# EAGLE board untitled (EAGLE 9.6.2)
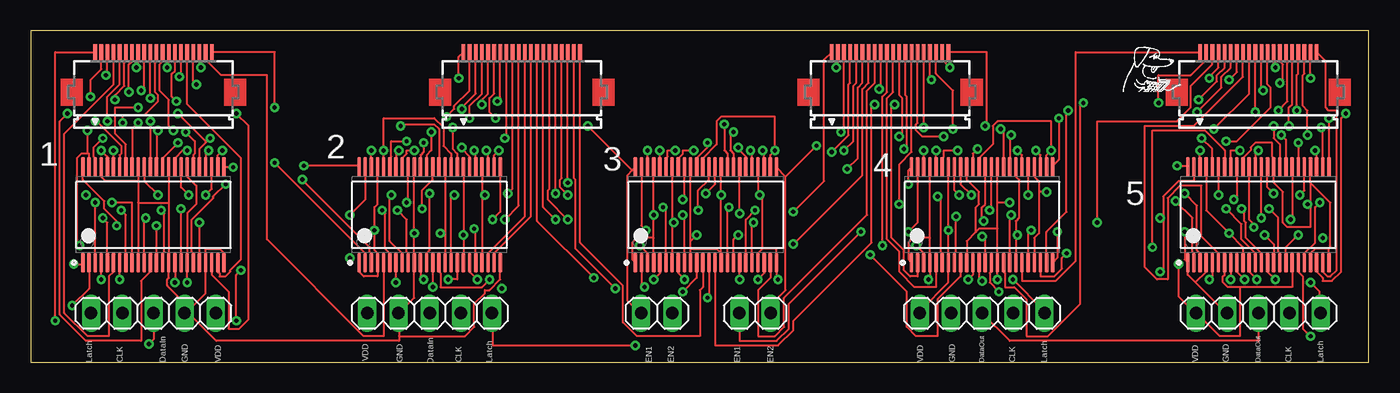
[diagram p0: board, top side]
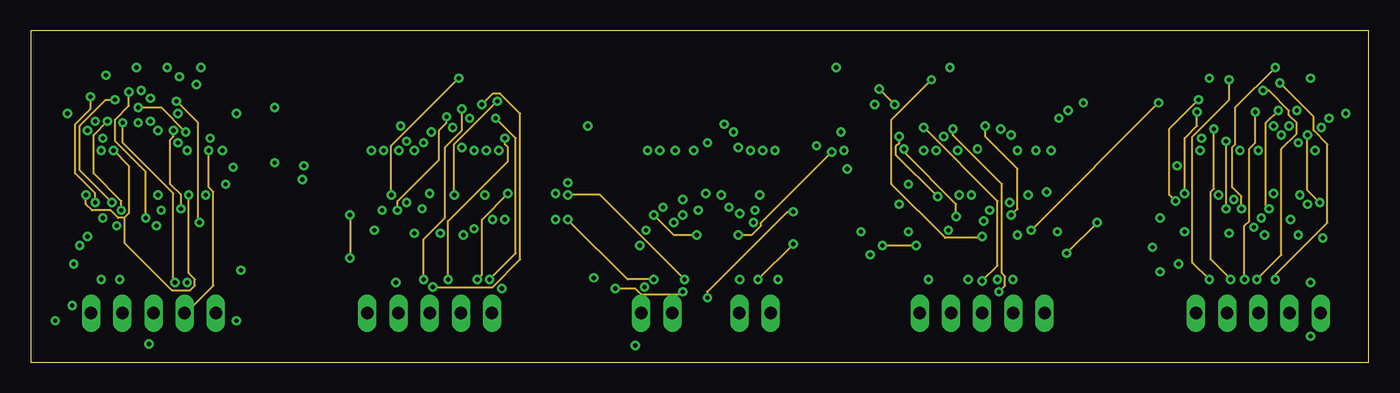
[diagram p1: board, inner layer Route2]
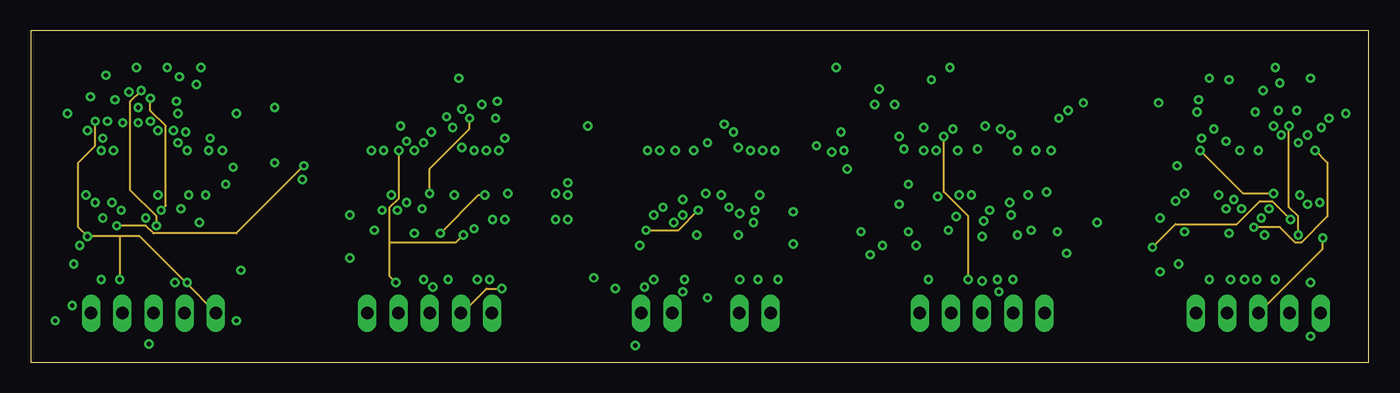
[diagram p2: board, inner layer Route15]
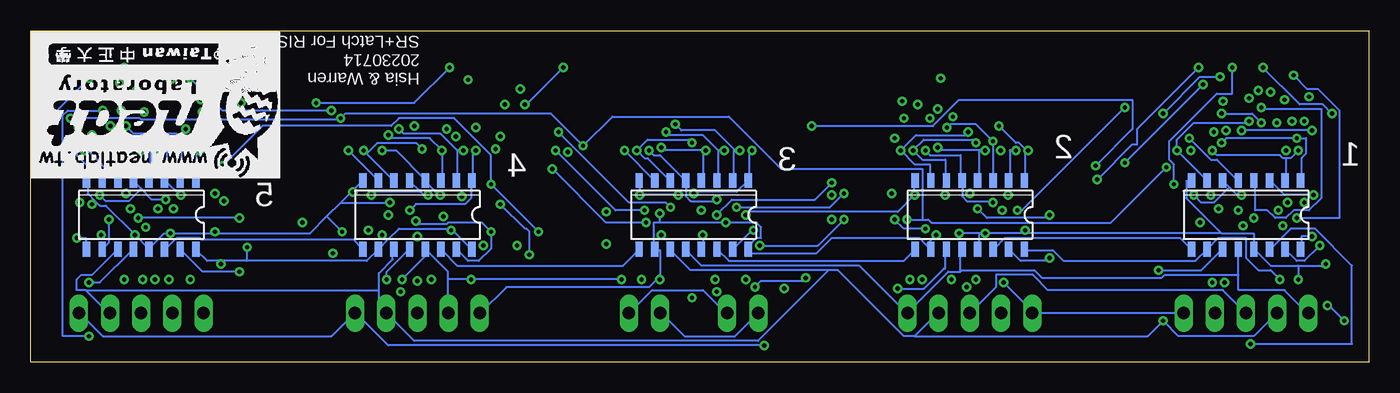
[diagram p3: board, bottom side, seen from below]

Size 109 x 27 mm. Coordinates in mm from the lower left corner, seen from the top.
Outline: 0,0 109,0 109,27 0,27 0,0
Copper layers (1*16): Top 0.035mm / dielectric 1.5mm / Bottom 0.035mm
Design rules "default": minimum track width 6mil, minimum drill 0.35mm, track to track 6mil, track to pad 6mil, pad to pad 6mil, via to via 6mil, smd to smd 6mil, copper to edge 40mil, drill to drill 6mil, minimum pad ring 10mil, minimum via ring 8mil, stop-mask expansion 4mil, vias tented up to drill 0mil, thermal gap 10mil

## Footprints (pad centres in the part's own frame; a part is rotated, then mirrored left to right if it is on the bottom)
1X05 = drill 1.016 long: 1 -5.08,0; 2 -2.54,0; 3 0,0; 4 2.54,0; 5 5.08,0
1X02 = drill 1.016 long: 1 -1.27,0; 2 1.27,0
SO16 = smd 0.6 x 1.2: 1 -4.445,-2.8; 2 -3.175,-2.8; 3 -1.905,-2.8; 4 -0.635,-2.8; 5 0.635,-2.8; 6 1.905,-2.8; 7 3.175,-2.8; 8 4.445,-2.8; 9 4.445,2.8; 10 3.175,2.8; 11 1.905,2.8; 12 0.635,2.8; 13 -0.635,2.8; 14 -1.905,2.8; 15 -3.175,2.8; 16 -4.445,2.8
TEXAS_INSTRUMENTS_SN74LVC16373A_2 = smd 1.6 x 0.3: 1 -3.9,5.75; 2 -3.9,5.25; 3 -3.9,4.75; 4 -3.9,4.25; 5 -3.9,3.75; 6 -3.9,3.25; 7 -3.9,2.75; 8 -3.9,2.25; 9 -3.9,1.75; 10 -3.9,1.25; 11 -3.9,0.75; 12 -3.9,0.25; 13 -3.9,-0.25; 14 -3.9,-0.75; 15 -3.9,-1.25; 16 -3.9,-1.75; 17 -3.9,-2.25; 18 -3.9,-2.75; 19 -3.9,-3.25; 20 -3.9,-3.75; 21 -3.9,-4.25; 22 -3.9,-4.75; 23 -3.9,-5.25; 24 -3.9,-5.75; 25 3.9,-5.75; 26 3.9,-5.25; 27 3.9,-4.75; 28 3.9,-4.25; 29 3.9,-3.75; 30 3.9,-3.25; 31 3.9,-2.75; 32 3.9,-2.25; 33 3.9,-1.75; 34 3.9,-1.25; 35 3.9,-0.75; 36 3.9,-0.25; 37 3.9,0.25; 38 3.9,0.75; 39 3.9,1.25; 40 3.9,1.75; 41 3.9,2.25; 42 3.9,2.75; 43 3.9,3.25; 44 3.9,3.75; 45 3.9,4.25; 46 3.9,4.75; 47 3.9,5.25; 48 3.9,5.75
FH12-20S-0.5SH = smd 0.3 x 1.3: 1 -4.75,3.25; 2 -4.25,3.25; 3 -3.75,3.25; 4 -3.25,3.25; 5 -2.75,3.25; 6 -2.25,3.25; 7 -1.75,3.25; 8 -1.25,3.25; 9 -0.75,3.25; 10 -0.25,3.25; 11 0.25,3.25; 12 0.75,3.25; 13 1.25,3.25; 14 1.75,3.25; 15 2.25,3.25; 16 2.75,3.25; 17 3.25,3.25; 18 3.75,3.25; 19 4.25,3.25; 20 4.75,3.25

## Placement (x,y rotation side)
JP1  [1X05]  10,4 180 top
JP2  [1X05]  32.5,4 0 top
JP3  [1X05]  77.5,4 0 top
JP4  [1X05]  100,4 0 top
JP5  [1X02]  59,4 0 top
JP6  [1X02]  51,4 0 top
SR1  74HC595  [SO16]  10,12 180 bottom
SR2  74HC595  [SO16]  32.5,12 180 bottom
SR3  74HC595  [SO16]  55,12 180 bottom
SR4  74HC595  [SO16]  77.5,12 180 bottom
SR5  74HC595  [SO16]  100,12 180 bottom
U1  TEXAS_INSTRUMENTS_SN74LVC16373ATEXAS_INSTRUMENTS_SN74LVC16373A_0_2  [TEXAS_INSTRUMENTS_SN74LVC16373A_2]  10,12 90 top
U2  TEXAS_INSTRUMENTS_SN74LVC16373ATEXAS_INSTRUMENTS_SN74LVC16373A_0_2  [TEXAS_INSTRUMENTS_SN74LVC16373A_2]  32.5,12 90 top
U3  TEXAS_INSTRUMENTS_SN74LVC16373ATEXAS_INSTRUMENTS_SN74LVC16373A_0_2  [TEXAS_INSTRUMENTS_SN74LVC16373A_2]  55,12 90 top
U4  TEXAS_INSTRUMENTS_SN74LVC16373ATEXAS_INSTRUMENTS_SN74LVC16373A_0_2  [TEXAS_INSTRUMENTS_SN74LVC16373A_2]  77.5,12 90 top
U5  TEXAS_INSTRUMENTS_SN74LVC16373ATEXAS_INSTRUMENTS_SN74LVC16373A_0_2  [TEXAS_INSTRUMENTS_SN74LVC16373A_2]  100,12 90 top
U$1  [LOGO_SCALE_2.0]  88.7,26.9 180 bottom
X1  FH12-20S-0.5SH  [FH12-20S-0.5SH]  10,22 0 top
X2  FH12-20S-0.5SH  [FH12-20S-0.5SH]  40,22 0 top
X3  FH12-20S-0.5SH  [FH12-20S-0.5SH]  70,22 0 top
X4  FH12-20S-0.5SH  [FH12-20S-0.5SH]  100,22 0 top

## Library data of the parts
JP1-JP6 = pinhead
SR1-SR5 = 74HC595; AVAILABILITY: In Stock; DESCRIPTION: Shift Register Single 8-Bit Serial to Serial/Parallel 16-Pin SSOP T/R; MF: Nexperia; MP: 74HC595; PACKAGE: None; PRICE: None
U1-U5 = SN74LVC16373A(NEW_16BIT_LATCH); 3_STATE_OUTPUT: Yes; BITS: 16; CIIVA_IDS: 19307467; CODE__JEDEC: MO-153; DATASHEET_VERSION: SCAS755B; FOOTPRINT_VARIANT_NAME_0: Level C; FOOTPRINT_VARIANT_NAME_1: Level B; FOOTPRINT_VARIANT_NAME_2: Level A; F__NOM_VOLTAGEMAXMHZ: 100; ICC__NOM_VOLTAGEMAXMA: 0.02; IMPORTED: yes; IMPORTED_FROM: vault; IMPORT_TS: 1521844253; INPUT_TYPE: CMOS,TTL; LOGIC: true; MF: Texas Instruments; MPN: SN74LVC16373A; OPERATING_TEMPERATURE_RANGEC: -40 to 125,-40 to 85; OUTPUT_DRIVE_IOLIOHMAXMA: 24/-24; OUTPUT_LOGIC: Non-inverted; OUTPUT_TYPE: CMOS; PACKAGE: DGG0048A; PREFIX: U; RATING: Catalog; RELEASE_DATE: 1459328133; SCHMITT_TRIGGER: No; STATIC_CURRENT: 0.02; TECHNOLOGY_FAMILY: LVC; TPD__NOM_VOLTAGEMAXNS: 6.4,4.2,4.9; VAULT_GUID: 00FB3570-8383-4C82-A038-A58A20934C8C; VAULT_REVISION: B0EE8CD6-9ACA-4FFF-ACFC-C0240CF4C59E; VCC_MAX_V: 3.6; VCC_MIN_V: 1.65; VOLTAGE_NOM_V: 1.8,2.5,2.7,3.3
U$1 = all_in_one
X1-X4 = con-hirose; MPN: FH12-20S-0.5SH(55); OC_FARNELL: 1324549; OC_NEWARK: 34M6166

## Nets
CLK: JP1.4 JP2.4 JP3.4 JP4.4 SR1.11 SR2.11 SR3.11 SR4.11 SR5.11
DATA_IN: JP1.3 JP2.3 SR1.14
DATA_OUT: JP3.3 JP4.3 SR5.9
EN1: JP5.1 JP6.1 U1.48 U2.48 U3.48 U4.48 U5.48
EN2: JP5.2 JP6.2 U1.25 U2.25 U3.25 U4.25 U5.25
GND: JP1.2 JP2.2 JP3.2 JP4.2 SR1.8 SR1.13 SR2.8 SR2.13 SR3.8 SR3.13 SR4.8 SR4.13 SR5.8 SR5.13 U1.1 U1.4 U1.10 U1.15 U1.21 U1.24 U1.28 U1.34 U1.39 U1.45 U2.1 U2.4 U2.10 U2.15 U2.21 U2.24 U2.28 U2.34 U2.39 U2.45 U3.1 U3.4 U3.10 U3.15 U3.21 U3.24 U3.28 U3.34 U3.39 U3.45 U4.1 U4.4 U4.10 U4.15 U4.21 U4.24 U4.28 U4.34 U4.39 U4.45 U5.1 U5.4 U5.10 U5.15 U5.21 U5.24 U5.28 U5.34 U5.39 U5.45
LATCH_CLK: JP1.5 JP2.5 JP3.5 JP4.5 SR1.12 SR2.12 SR3.12 SR4.12 SR5.12
LED1_1: U1.2 X1.1
LED1_2: U1.3 X1.2
LED1_3: U1.5 X1.3
LED1_4: U1.6 X1.4
LED1_5: U1.8 X1.5
LED1_6: U1.9 X1.6
LED1_7: U1.11 X1.7
LED1_8: U1.12 X1.8
LED1_9: U1.13 X1.9
LED1_10: U1.14 X1.10
LED1_11: U1.16 X1.11
LED1_12: U1.17 X1.12
LED1_13: U1.19 X1.13
LED1_14: U1.20 X1.14
LED1_15: U1.22 X1.15
LED1_16: U1.23 X1.16
LED1_17: U2.2 X1.17
LED1_18: U2.3 X1.18
LED1_19: U2.5 X1.19
LED1_20: U2.6 X1.20
LED1_21: U2.8 X2.1
LED1_22: U2.9 X2.2
LED1_23: U2.11 X2.3
LED1_24: U2.12 X2.4
LED1_25: U2.13 X2.5
LED1_26: U2.14 X2.6
LED1_27: U2.16 X2.7
LED1_28: U2.17 X2.8
LED1_29: U2.19 X2.9
LED1_30: U2.20 X2.10
LED1_31: U2.22 X2.11
LED1_32: U2.23 X2.12
LED1_33: U3.2 X2.13
LED1_34: U3.3 X2.14
LED1_35: U3.5 X2.15
LED1_36: U3.6 X2.16
LED1_37: U3.8 X2.17
LED1_38: U3.9 X2.18
LED1_39: U3.11 X2.19
LED1_40: U3.12 X2.20
LED2_1: U3.13 X3.1
LED2_2: U3.14 X3.2
LED2_3: U3.16 X3.3
LED2_4: U3.17 X3.4
LED2_5: U3.19 X3.5
LED2_6: U3.20 X3.6
LED2_7: U3.22 X3.7
LED2_8: U3.23 X3.8
LED2_9: U4.2 X3.9
LED2_10: U4.3 X3.10
LED2_11: U4.5 X3.11
LED2_12: U4.6 X3.12
LED2_13: U4.8 X3.13
LED2_14: U4.9 X3.14
LED2_15: U4.11 X3.15
LED2_16: U4.12 X3.16
LED2_17: U4.13 X3.17
LED2_18: U4.14 X3.18
LED2_19: U4.16 X3.19
LED2_20: U4.17 X3.20
LED2_21: U4.19 X4.1
LED2_22: U4.20 X4.2
LED2_23: U4.22 X4.3
LED2_24: U4.23 X4.4
LED2_25: U5.2 X4.5
LED2_26: U5.3 X4.6
LED2_27: U5.5 X4.7
LED2_28: U5.6 X4.8
LED2_29: U5.8 X4.9
LED2_30: U5.9 X4.10
LED2_31: U5.11 X4.11
LED2_32: U5.12 X4.12
LED2_33: U5.13 X4.13
LED2_34: U5.14 X4.14
LED2_35: U5.16 X4.15
LED2_36: U5.17 X4.16
LED2_37: U5.19 X4.17
LED2_38: U5.20 X4.18
LED2_39: U5.22 X4.19
LED2_40: U5.23 X4.20
N$1: SR1.9 SR2.14
N$2: SR4.9 SR5.14
N$4: SR3.9 SR4.14
N$8: SR2.9 SR3.14
SR_OUT1_1: SR1.15 U1.36 U1.47
SR_OUT1_2: SR1.1 U1.35 U1.46
SR_OUT1_3: SR1.2 U1.33 U1.44
SR_OUT1_4: SR1.3 U1.32 U1.43
SR_OUT1_5: SR1.4 U1.30 U1.41
SR_OUT1_6: SR1.5 U1.29 U1.40
SR_OUT1_7: SR1.6 U1.27 U1.38
SR_OUT1_8: SR1.7 U1.26 U1.37
SR_OUT2_1: SR2.15 U2.36 U2.47
SR_OUT2_2: SR2.1 U2.35 U2.46
SR_OUT2_3: SR2.2 U2.33 U2.44
SR_OUT2_4: SR2.3 U2.32 U2.43
SR_OUT2_5: SR2.4 U2.30 U2.41
SR_OUT2_6: SR2.5 U2.29 U2.40
SR_OUT2_7: SR2.6 U2.27 U2.38
SR_OUT2_8: SR2.7 U2.26 U2.37
SR_OUT3_1: SR3.15 U3.36 U3.47
SR_OUT3_2: SR3.1 U3.35 U3.46
SR_OUT3_3: SR3.2 U3.33 U3.44
SR_OUT3_4: SR3.3 U3.32 U3.43
SR_OUT3_5: SR3.4 U3.30 U3.41
SR_OUT3_6: SR3.5 U3.29 U3.40
SR_OUT3_7: SR3.6 U3.27 U3.38
SR_OUT3_8: SR3.7 U3.26 U3.37
SR_OUT4_1: SR4.15 U4.36 U4.47
SR_OUT4_2: SR4.1 U4.35 U4.46
SR_OUT4_3: SR4.2 U4.33 U4.44
SR_OUT4_4: SR4.3 U4.32 U4.43
SR_OUT4_5: SR4.4 U4.30 U4.41
SR_OUT4_6: SR4.5 U4.29 U4.40
SR_OUT4_7: SR4.6 U4.27 U4.38
SR_OUT4_8: SR4.7 U4.26 U4.37
SR_OUT5_1: SR5.15 U5.36 U5.47
SR_OUT5_2: SR5.1 U5.35 U5.46
SR_OUT5_3: SR5.2 U5.33 U5.44
SR_OUT5_4: SR5.3 U5.32 U5.43
SR_OUT5_5: SR5.4 U5.30 U5.41
SR_OUT5_6: SR5.5 U5.29 U5.40
SR_OUT5_7: SR5.6 U5.27 U5.38
SR_OUT5_8: SR5.7 U5.26 U5.37
VCC: JP1.1 JP2.1 JP3.1 JP4.1 SR1.10 SR1.16 SR2.10 SR2.16 SR3.10 SR3.16 SR4.10 SR4.16 SR5.10 SR5.16 U1.7 U1.18 U1.31 U1.42 U2.7 U2.18 U2.31 U2.42 U3.7 U3.18 U3.31 U3.42 U4.7 U4.18 U4.31 U4.42 U5.7 U5.18 U5.31 U5.42

## Tracks (layer width: path | path; a pad name or v marks a point on that pad's centre or on a via)
CLK  (via drill 0.35)
  Top 0.152: v17.12,7.5 16.75,7.12 v16.75,3.38
  Route15 0.152: v38.38,6 37.12,6 35.12,4 JP2.4
  Bottom 0.152: 80.62,5.88 80.62,4 JP3.4 80,4 77.75,1.75 49.75,1.75 44,7.5 | 80.62,5.88 80.62,7.25 79.5,8.38 79.5,9.12 SR4.11 | 104.5,5.88 105.25,5.88 105.25,6.75 104.88,7.12 104,7.12 102,9.12 SR5.11 | 104.5,5.88 102.62,4 JP4.4 | 104.5,5.88 80.62,5.88 | v17.12,7.5 13.62,7.5 12,9.12 SR1.11 | JP1.4 7.5,4 9.38,2.12 15.5,2.12 v16.75,3.38 18,2.12 37,2.12 | v38.38,6 36.25,6 34.62,7.62 34.5,7.62 34.5,9.12 SR2.11 | 44,7.5 43.25,7.5 37.88,2.12 37,2.12 | 44,7.5 55.25,7.5 56.88,9.12 SR3.11 | 37,2.12 35.12,4 JP2.4
DATA_IN  (via drill 0.35)
  Top 0.152: v9.62,1.5 10,1.88 JP1.3
  Bottom 0.152: v9.62,1.5 1.38,1.5 1.38,7.88 4.38,10.88 6.38,10.88 8,9.25 SR1.14 | JP2.3 30.38,6.12 30.38,7.12 27.38,7.12 26.12,5.88 11.88,5.88 JP1.3
DATA_OUT  (via drill 0.35)
  Top 0.152: JP3.3 79.75,1.75 100,1.75 JP4.3
  Route15 0.152: v105.25,10.12 105.25,9.25 JP4.3
  Bottom 0.152: v105.25,10.12 104.5,10.12 104.5,9.25 SR5.9
EN1  (via drill 0.35)
  Top 0.152: U1.48 4.25,14.88 6,13.12 6,12.5 7,11.5 v7,11.12 | v22.25,16 26.75,16 U2.48 | 49,15.62 48.62,15.25 48.62,5 49.62,4 JP6.1 | 49,15.62 49.25,15.88 U3.48 | v71.5,14.5 71.5,15.62 71.75,15.88 U4.48 | v67.62,10.62 61.75,4.75 61.75,2.75 60.75,1.75 57.75,1.75 57.75,4 JP5.1 | v93.38,16 94.25,16 U5.48 | 49,15.62 v45.38,19.25
  Route15 0.152: v7,11.12 9.38,11.12 10,10.5 16.75,10.5 v22.25,16
  Bottom 0.152: v67.62,10.62 v71.5,14.5 71.5,16.88 74.5,19.88 79,19.88 79.62,19.25 90.12,19.25 v93.38,16 | JP6.1 49.75,4 51.62,2.12 55.75,2.12 57.62,4 JP5.1 | v22.25,16 19.25,19 19.25,21.38 33.38,21.38 35.5,19.25 v45.38,19.25
EN2  (via drill 0.35)
  Top 0.152: v16.5,15.88 15.75,15.88 U1.25 | v37.62,11.62 38.25,12.25 U2.25 | 61.5,15.12 60.75,15.88 U3.25 | 61.5,15.12 61.5,5.88 60.38,4.75 60.38,4 JP5.2 | v83.75,19.88 83.75,16.5 83.25,16 U4.25 | 61.5,15.12 v64,17.62 | v105.75,19.88 U5.25
  Bottom 0.152: v16.5,15.88 21,11.38 35.62,11.38 35.88,11.62 36.38,11.62 | v37.62,11.62 36.38,11.62 | v105.75,19.88 100.12,19.88 100,19.75 83.88,19.75 v83.75,19.88 83.38,20.25 66.62,20.25 v64,17.62 61.62,20 52.12,20 47.88,15.75 36.38,15.75 36.38,11.62 | JP6.2 52.38,4 54.25,5.88 58.38,5.88 60.25,4 JP5.2
GND  (via drill 0.35)
  Top 0.152: U4.10 76.25,9.88 77,10.62 | 77,10.62 77.25,10.88 78.75,10.88 | 78.75,10.88 U4.15 v78.75,6.75 | U4.39 76.25,14.88 77.25,13.88 77.25,12.88 77,12.62 77,10.62 | 78.75,10.88 78.75,13 | 78.75,13 U4.34 | 73.25,10.12 71.88,10.12 71.5,9.75 71.5,8.38 71.75,8.12 U4.1 | 73.25,10.12 U4.4 73.25,6.88 v73.12,6.75 | 73.25,10.12 U4.45 | U5.39 98.75,16.62 99.38,17.25 99.38,17.5 99.75,17.88 101.12,17.88 101.12,16.75 101.25,16.62 U5.34 101.25,14.62 102,13.88 102,11.38 102.38,11 104.25,11 104.25,12.88 | U5.21 104.25,8.88 104.62,9.25 105.75,9.25 | U5.24 105.75,9.25 | 104.25,14.62 U5.28 | 104.25,14.62 105.88,13 105.88,9.38 105.75,9.25 | 104.25,14.62 104.25,12.88 | U5.10 98.75,9.38 v97.62,10.5 95.75,12.38 U5.45 | 94.88,6.5 97.38,4 JP4.2 | 94.88,6.5 94.25,7.12 U5.1 94.25,8.12 94,8.38 v94,10.62 | U5.4 95.75,7.38 94.88,6.5 | U4.21 81.75,10.12 82.12,10.5 82.12,13.88 | 82.12,13.88 82.12,14.75 81.75,15.12 U4.28 | v83.62,10.62 83.62,8.5 83.25,8.12 U4.24 | U5.15 101.25,9.62 v100.5,10.38 | v82.75,13.88 82.12,13.88 | v104,12.88 104.25,12.88 | v79.75,13 78.75,13 | U1.34 11.25,13 | 11.25,13 U1.15 11.25,6.88 11.12,6.75 11.12,6.25 13,4.38 | U1.39 8.75,14.75 | 8.75,14.75 8.75,13 | 8.75,13 U1.10 | U1.45 5.75,15.12 6.12,14.75 8.75,14.75 | 8.75,13 11.25,13 | 12.75,4.12 12.62,4 JP1.2 | 12.75,4.12 13,4.38 | 13,4.38 14.25,5.62 U1.21 14.25,9.25 15.38,9.25 15.75,8.88 U1.24 | U1.28 14.25,17 v14.5,17.25 | 13,4.38 JP1.2 | 30,4 31.25,5.25 U2.10 v31.25,10.5 U2.39 | U2.24 38.25,6.75 37.38,5.88 37,5.88 37,5.62 36.12,4.75 36.12,2.88 35.38,2.12 30,2.12 | 30,4 30,2.12 | 30,4 JP2.2 | U3.28 59.25,13.75 v59.38,13.62 59.62,13.38 59.62,9.25 | U3.21 59.25,8.88 59.62,9.25
  Top 0.152: 59.62,9.25 60.75,9.25 U3.24 60.75,6.88 v60.88,6.75 | 53.75,9.88 v54.25,10.38 | U3.10 53.75,9.25 | 53.75,9.25 53.75,9.88 | 56.25,8.88 U3.15 | 56.25,8.88 55.88,9.25 53.75,9.25 | 53.75,9.88 U3.39 | 56.25,8.88 v56.25,13.62 U3.34 | 50.75,10.12 49.38,10.12 49,9.75 49,8.38 49.25,8.12 U3.1 | U3.4 50.75,10.12 | 50.75,10.12 v50.75,12 U3.45 | U2.1 26.75,7.38 27.12,7 28.25,7 U2.4 28.25,8.88 28,9.12 v28,10.75 28,12.62 28.25,12.88 U2.45 | U2.28 36.75,13.88 | 36.75,13.88 U2.21 | 36.75,13.88 v37,13.62 | U2.34 33.75,10.5 | 33.75,10.5 U2.15 | v3.5,8 4.25,8 U1.1 | v5.75,6.75 U1.4 | v33.38,10.5 33.75,10.5 | 12.75,4.12 15.12,1.75 30,1.75 30,2.12 | 12.75,4.12 JP1.2
  Route2 0.152: v14.5,17.25 14.5,14.25 14.88,13.88 14.88,6.25 12.62,4 JP1.2 | v54.25,10.38 52.38,10.38 v50.75,12
  Route15 0.152: v37,13.62 36.5,13.62 v33.38,10.5
  Bottom 0.152: 76.5,8.88 75,7.38 75,6.75 | 76.5,8.88 76.75,9.12 SR4.13 | 75,6.75 75,4 JP3.2 | 75,6.75 v73.12,6.75 v60.88,6.75 | v78.75,6.75 76.62,8.88 76.5,8.88 | 99.38,9.25 v100.5,10.38 102.88,12.75 103.38,12.75 103.75,13.12 | 103.75,13.12 104.38,13.75 104.38,14.75 SR5.8 | 84.88,11.88 86.25,10.5 94,10.5 | 84.88,11.88 83.75,13 | 83.75,13 82.75,14 | 82.75,14 82,14.75 SR4.8 | 94,10.5 v97.62,10.5 98.12,10.5 99.38,9.25 | 99.38,9.25 SR5.13 | 84.88,11.88 v83.62,10.62 | 82.75,14 v82.75,13.88 | 94,10.5 v94,10.62 | 103.75,13.12 v104,12.88 | 83.75,13 v79.75,13 | SR3.8 59.38,14.75 v59.38,13.62 v56.25,13.62 | v54.25,10.38 54.25,9.25 SR3.13 | SR2.8 37,14.75 v37,13.62 38.38,12.25 50.5,12.25 v50.75,12 | 12,10.5 9.38,10.5 9.38,9.25 SR1.13 9.25,9.12 8,7.88 5.75,7.88 | 12,10.5 14.88,13.38 14.88,14.75 14.5,14.75 SR1.8 | 31.75,10.5 31.75,9.25 SR2.13 | 12,10.5 28,10.5 | 28,10.5 v31.25,10.5 31.75,10.5 | v3.5,8 3.62,7.88 5.75,7.88 | 5.75,7.88 v5.75,6.75 | 31.75,10.5 v33.38,10.5 | 28,10.5 v28,10.75
LATCH_CLK  (via drill 0.35)
  Top 0.152: v80,6.75 82.5,4.25 82.5,4 JP3.5 | v104.25,6.5 105,5.75 105,4 JP4.5 | v49.25,1.38 37.62,1.38 37.62,4 JP2.5
  Bottom 0.152: v80,6.75 80,7.38 78.25,9.12 SR4.12 | v104.25,6.5 103.38,6.5 100.75,9.12 SR5.12 | JP4.5 105,4 103.12,2.12 84.5,2.12 82.62,4 JP3.5 82.5,4 79.88,1.38 v49.25,1.38 | 10.62,7.12 10.62,5.88 6.88,5.88 5,4 JP1.5 | 10.62,7.12 10.62,9.12 SR1.12 | 33.25,7.5 33.25,7.38 34.25,7.38 37.62,4 | 33.25,7.5 33.25,9.12 SR2.12 | 37.62,4 41.5,7.88 54.38,7.88 55.62,9.12 SR3.12 | 37.62,4 JP2.5 | 10.62,7.12 16.62,7.12 16.88,6.88 26.62,6.88 27.25,7.5 33.25,7.5
LED1_1  (via drill 0.35)
  Top 0.152: X1.1 2,25.25 v2,3.38 | v3.38,4.62 4.75,6 U1.2
  Bottom 0.152: v2,3.38 3.25,4.62 v3.38,4.62
LED1_2  (via drill 0.35)
  Top 0.152: X1.2 5.75,23.88 4.88,23 v4.88,21.62 | U1.3 v5.25,13
  Route2 0.152: v4.88,21.62 4.88,20.62 3.62,19.38 3.62,15.38 5.25,13.75 v5.25,13
LED1_3  (via drill 0.35)
  Top 0.152: X1.3 6.25,23.5 v6.12,23.38 | v5.88,11.75 6.25,11.38 U1.5
  Bottom 0.152: v6.12,23.38 5,22.25 4.12,22.25 2.38,20.5 2.38,11.75 v5.88,11.75
LED1_4
  Top 0.152: X1.4 6.75,22.62 2.75,18.62 2.75,4 4.62,2.12 6.38,2.12 6.38,7 6.75,7.38 U1.6
LED1_5  (via drill 0.35)
  Top 0.152: X1.5 7.25,22.62 6.25,21.62 v6.25,19.62 | v7.38,12.38 7.75,12 U1.8
  Route2 0.152: v6.25,19.62 5.12,18.5 5.12,15.38 7.38,13.12 v7.38,12.38
LED1_6  (via drill 0.35)
  Top 0.152: X1.6 7.75,24.5 7.62,24.38 7.62,22.5 6.88,21.75 v6.88,21.38 | v6.62,13 8.25,13 U1.9
  Route2 0.152: v6.88,21.38 6.12,21.38 4,19.25 4,15.62 v6.62,13
LED1_7  (via drill 0.35)
  Top 0.152: X1.7 8.25,24.5 8,24.25 v8,22 | v9.38,11.75 9.25,11.62 U1.11
  Route2 0.152: v8,22 8,20.88 6.88,19.75 6.88,18 9.38,15.5 v9.38,11.75
LED1_8  (via drill 0.35)
  Top 0.152: X1.8 8.75,24.12 v8.62,24 | v3,20.25 2.38,19.62 2.38,3.88 4.5,1.75 9,1.75 9,6.62 9.75,7.38 U1.12
  Bottom 0.152: v8.62,24 5.62,21 3.75,21 v3,20.25
LED1_9  (via drill 0.35)
  Top 0.152: X1.9 9.25,22.38 v9,22.12 | U1.13 v10.25,11.12
  Route15 0.152: v9,22.12 8.12,21.25 8.12,14 10.25,11.88 v10.25,11.12
LED1_10  (via drill 0.35)
  Top 0.152: v9.75,21.5 X1.10 | v10.62,12.38 10.88,12.12 10.88,9 10.75,8.88 U1.14
  Route15 0.152: v9.75,21.5 9.75,20.5 11,19.25 11,12.75 v10.62,12.38
LED1_11  (via drill 0.35)
  Top 0.152: X1.11 10.25,24.5 10.12,24.38 10.12,22 10.38,21.75 10.38,21.25 9.25,20.12 7.5,20.12 v7.5,19.5 | U1.16 v11.75,6.5
  Route2 0.152: v7.5,19.5 7.5,17.88 11.62,13.75 11.62,6.62 v11.75,6.5
LED1_12  (via drill 0.35)
  Top 0.152: X1.12 10.75,24.5 10.5,24.25 10.5,22.12 11.25,21.38 11.25,19.25 v11.62,18.88 | U1.17 v12.25,12.5
  Route2 0.152: v11.62,18.88 11.62,18.38 11.38,18.12 11.38,14.5 12.25,13.62 v12.25,12.5
LED1_13  (via drill 0.35)
  Top 0.152: X1.13 11.25,24.12 v11.12,24 | v15.88,14.5 14.88,13.5 14.88,13.38 13.12,11.62 13.12,9 13.25,8.88 U1.19
  Bottom 0.152: v11.12,24 11.12,21.88 12.38,21.88 16.25,18 16.25,16.5 15.88,16.12 v15.88,14.5
LED1_14  (via drill 0.35)
  Top 0.152: X1.14 11.75,23.75 11.5,23.5 11.5,21.62 v11.88,21.25 | U1.20 v13.75,11.38
  Route2 0.152: v11.88,21.25 13.62,19.5 13.62,11.5 v13.75,11.38
LED1_15  (via drill 0.35)
  Top 0.152: X1.15 12.25,23.38 v12.12,23.25 | v16.75,20.25 17.75,19.25 17.75,3.5 17,2.75 16.12,2.75 16.12,5.75 14.75,7.12 U1.22
  Bottom 0.152: v12.12,23.25 13.75,23.25 v16.75,20.25
LED1_16
  Top 0.152: X1.16 12.75,21 17.12,16.62 17.12,8.38 16.25,7.5 16.25,7.38 15.88,7 15.38,7 15.38,7.25 15.25,7.38 U1.23
LED1_17  (via drill 0.35)
  Top 0.152: X1.17 13.25,22.88 v13.5,22.62 | v19.88,16.25 27.25,8.88 U2.2
  Bottom 0.152: v19.88,16.25 v13.5,22.62
LED1_18  (via drill 0.35)
  Top 0.152: X1.18 13.75,24.12 v13.88,24 | v22.12,14.88 27.62,9.38 27.62,9 27.75,8.88 U2.3
  Bottom 0.152: v13.88,24 18.88,19 18.88,17.75 19.25,17.75 v22.12,14.88
LED1_19
  Top 0.152: X1.19 14.25,24.62 15.5,23.38 19.25,23.38 19.25,10 27.12,2.12 28.75,2.12 U2.5
LED1_20  (via drill 0.35)
  Top 0.152: X1.20 19.88,25.25 v19.88,20.75 | v28.62,12.38 28.88,12.12 28.88,9.25 29.25,8.88 U2.6
  Bottom 0.152: v19.88,20.75 28.25,12.38 v28.62,12.38
LED1_21  (via drill 0.35)
  Top 0.152: X2.1 34.88,24.88 v34.88,23.12 | v29.38,13.62 29.25,13.5 29.25,9.88 30.25,8.88 U2.8
  Route2 0.152: v34.88,23.12 29.38,17.62 v29.38,13.62
LED1_22  (via drill 0.35)
  Top 0.152: X2.2 35.75,22.12 34.5,20.88 34.5,20.62 v33.88,20 | v29.88,12.38 30.62,11.62 30.62,9 30.75,8.88 U2.9
  Route2 0.152: v33.88,20 33.88,19.5 33.25,18.88 33.25,16.5 29.88,13.12 v29.88,12.38
LED1_23  (via drill 0.35)
  Top 0.152: X2.3 36.25,21.88 35.12,20.75 v35.12,20.62 | v32,6.75 31.75,7 U2.11
  Route2 0.152: v35.12,20.62 35.12,18.88 33.75,17.5 33.75,11.75 32,10 v32,6.75
LED1_24  (via drill 0.35)
  Top 0.152: X2.4 36.75,21.88 35.75,20.88 v35.75,19.88 | v32.5,13.75 32.5,9.12 32.25,8.88 U2.12
  Route15 0.152: v35.75,19.88 35.75,19 32.5,15.75 v32.5,13.75
LED1_25  (via drill 0.35)
  Top 0.152: X2.5 37.25,21.88 36.75,21.38 v36.75,21 | U2.13 v32.75,6.12
  Route2 0.152: v36.75,21 37.62,21.88 38.25,21.88 39.88,20.25 39.88,8.38 37.62,6.12 v32.75,6.12
LED1_26  (via drill 0.35)
  Top 0.152: X2.6 37.75,21.88 37.38,21.5 37.38,20.38 v37.88,19.88 | v37.38,6.75 36.75,6.12 33.38,6.12 33.38,7.25 33.25,7.38 U2.14
  Route2 0.152: v37.88,19.88 39.5,18.25 39.5,8.88 v37.38,6.75
LED1_27  (via drill 0.35)
  Top 0.152: X2.7 38.25,21.5 v38,21.25 | v34.5,13.62 34.25,13.38 U2.16
  Route2 0.152: v38,21.25 34.5,17.75 v34.5,13.62
LED1_28  (via drill 0.35)
  Top 0.152: X2.8 38.75,18.38 v38.62,18.25 | v34,6.75 34.75,6.75 U2.17
  Route2 0.152: v38.62,18.25 38.62,17.75 38.88,17.5 38.88,16.38 34,11.5 v34,6.75
LED1_29  (via drill 0.35)
  Top 0.152: X2.9 39.25,14.12 v38.88,13.75 | v36.38,6.75 35.75,7.38 U2.19
  Route2 0.152: v38.88,13.75 36.75,11.62 36.75,7.12 v36.38,6.75
LED1_30  (via drill 0.35)
  Top 0.152: X2.10 39.75,12.75 v38.62,11.62 | v36.12,10.88 36.25,10.75 U2.20
  Bottom 0.152: v38.62,11.62 37.88,10.88 v36.12,10.88
LED1_31
  Top 0.152: X2.11 40.25,11.88 37.25,8.88 U2.22
LED1_32
  Top 0.152: X2.12 40.75,11.88 37.75,8.88 U2.23
LED1_33  (via drill 0.35)
  Top 0.152: X2.13 41.25,11.5 v45.88,6.88 | v50,6.12 49.75,6.38 U3.2
  Bottom 0.152: v45.88,6.88 46.12,6.62 49.5,6.62 v50,6.12
LED1_34  (via drill 0.35)
  Top 0.152: X2.14 41.75,12.62 v42.75,11.62 | v49.62,9.5 50.25,8.88 U3.3
  Bottom 0.152: v42.75,11.62 44.88,9.5 v49.62,9.5
LED1_35  (via drill 0.35)
  Top 0.152: X2.15 42.25,14.12 42.12,14 42.12,13.25 v43.75,11.62 | v50.75,6.75 51.25,7.25 U3.5
  Route2 0.152: v43.75,11.62 48.62,6.75 v50.75,6.75
LED1_36  (via drill 0.35)
  Top 0.152: v42.75,13.75 X2.16 | v51.5,12.62 51.75,12.38 U3.6
  Bottom 0.152: v42.75,13.75 43.88,12.62 v51.5,12.62
LED1_37  (via drill 0.35)
  Top 0.152: X2.17 43.25,15 43.12,14.88 43.12,14.25 v43.75,13.62 | v53.25,6.75 52.75,7.25 U3.8
  Route2 0.152: v43.75,13.62 46.38,13.62 v53.25,6.75
LED1_38  (via drill 0.35)
  Top 0.152: v43.75,14.62 X2.18 | v53.12,12 53.25,11.88 U3.9
  Bottom 0.152: v43.75,14.62 45.12,13.25 51.88,13.25 v53.12,12
LED1_39  (via drill 0.35)
  Top 0.152: X2.19 44.25,15 44.38,14.88 44.38,9.25 v47.62,6 | v53.12,5.75 54.25,6.88 U3.11
  Route2 0.152: v47.62,6 49.25,6 49.75,5.5 52.88,5.5 v53.12,5.75
LED1_40
  Top 0.152: X2.20 44.75,9.75 48.25,6.25 48.25,3.25 49.38,2.12 54.5,2.12 54.5,5.88 54.75,6.12 U3.12
LED2_1  (via drill 0.35)
  Top 0.152: X3.1 64.62,24.62 64.62,14.75 v62.12,12.25 | v55.12,5.25 55.25,5.38 U3.13
  Route2 0.152: v62.12,12.25 61.62,12.25 55.12,5.75 v55.12,5.25
LED2_2  (via drill 0.35)
  Top 0.152: X3.2 65.75,24.12 v65.62,24 | v68.75,21 68.5,20.75 68.5,9.75 62.12,3.38 62.12,2.62 60.88,1.38 55.75,1.38 U3.14
  Bottom 0.152: v65.62,24 68.62,21 v68.75,21
LED2_3  (via drill 0.35)
  Top 0.152: X3.3 66.25,19 v66,18.75 | v56.88,12.62 56.75,12.5 U3.16
  Bottom 0.152: v66,18.75 60.25,13 57.25,13 v56.88,12.62
LED2_4  (via drill 0.35)
  Top 0.152: X3.4 66.75,22.75 66.62,22.62 66.62,18.5 v65.25,17.12 | v57.62,10.38 57.25,10 U3.17
  Route2 0.152: v65.25,17.12 59.5,11.38 59.5,11.12 58.75,10.38 v57.62,10.38
LED2_5  (via drill 0.35)
  Top 0.152: X3.5 67.25,22.75 67,22.5 67,18 v66.25,17.25 | v59,12.38 58.25,11.62 U3.19
  Bottom 0.152: v66.25,17.25 61.38,12.38 v59,12.38
LED2_6  (via drill 0.35)
  Top 0.152: X3.6 67.75,22.75 67.38,22.38 67.38,16.62 v66.5,15.75 | v58.88,11.38 58.75,11.25 U3.20
  Bottom 0.152: v66.5,15.75 62.12,11.38 v58.88,11.38
LED2_7  (via drill 0.35)
  Top 0.152: X3.7 68.25,22.75 67.75,22.25 67.75,15.25 v62.12,9.62 | v59.25,6.75 59.75,7.25 U3.22
  Route2 0.152: v59.25,6.75 v62.12,9.62
LED2_8
  Top 0.152: X3.8 68.75,22.75 68.12,22.12 68.12,12 61.38,5.25 61.38,2.88 60.62,2.12 59.25,2.12 59.25,5.88 60.25,6.88 U3.23
LED2_9  (via drill 0.35)
  Top 0.152: X3.9 69.25,22.38 v69.12,22.25 | v70.38,21 70.12,20.75 70.12,10.12 71.12,9.12 71.12,7.5 71.62,7 72.25,7 U4.2
  Route2 0.152: v70.38,21 v69.12,22.25
LED2_10  (via drill 0.35)
  Top 0.152: X3.10 69.75,22 69.38,21.62 v69.38,9.5 | v72.12,9.5 72.75,8.88 U4.3
  Route2 0.152: v72.12,9.5 v69.38,9.5
LED2_11
  Top 0.152: X3.11 70.25,22 69.75,21.5 69.75,10 70.75,9 70.75,7.38 72,6.12 73.75,6.12 U4.5
LED2_12  (via drill 0.35)
  Top 0.152: X3.12 70.75,21.75 71,21.5 71,18.62 v70.75,18.38 | v73.88,13.5 74.12,13.25 74.12,9 74.25,8.88 U4.6
  Route2 0.152: v70.75,18.38 70.75,17.88 70.5,17.62 70.5,16.88 v73.88,13.5
LED2_13  (via drill 0.35)
  Top 0.152: X3.13 71.25,21.75 71.38,21.62 71.38,17.62 v71.12,17.38 | v75.38,11.88 75.38,9 75.25,8.88 U4.8
  Route2 0.152: v71.12,17.38 71.12,17.12 75.38,12.88 v75.38,11.88
LED2_14  (via drill 0.35)
  Top 0.152: X3.14 71.75,17.12 70.75,16.12 v70.75,12.88 | v68.38,8.75 71.38,5.75 71.38,2.88 72.12,2.12 73.88,2.12 73.88,5.12 75.75,7 U4.9
  Bottom 0.152: v70.75,12.88 68.75,10.88 68.62,10.88 68.38,10.62 v68.38,8.75
LED2_15  (via drill 0.35)
  Top 0.152: X3.15 72.25,19.5 72.12,19.38 72.12,18.88 72.62,18.38 v74.38,18.38 | v76.38,6.75 76.75,7.12 U4.11
  Route15 0.152: v74.38,18.38 74.38,13.88 76.38,11.88 v76.38,6.75
LED2_16  (via drill 0.35)
  Top 0.152: v72.75,19.12 X3.16 | v77.5,6.62 77.25,6.88 U4.12
  Route2 0.152: v72.75,19.12 78.75,13.12 78.75,7.88 v77.5,6.62
LED2_17  (via drill 0.35)
  Top 0.152: X3.17 73.25,23.12 v73.38,23 | v77.5,10.25 77.75,10 U4.13
  Route2 0.152: v73.38,23 70.12,19.75 70.12,14.5 74.5,10.12 77.38,10.12 v77.5,10.25
LED2_18  (via drill 0.35)
  Top 0.152: X3.18 73.75,23.5 75.12,22.12 v75.12,19 | v78.88,5.75 78.12,6.5 78.12,7.25 78.25,7.38 U4.14
  Route2 0.152: v75.12,19 75.12,18.5 79.12,14.5 79.12,7.25 79.38,7 79.38,6.25 v78.88,5.75
LED2_19  (via drill 0.35)
  Top 0.152: X3.19 74.25,24.62 v74.88,24 | v85.75,21.12 85.5,20.88 85.5,4.75 82.88,2.12 81.12,2.12 81.12,5.12 80.12,6.12 79.38,6.12 79.38,7.25 79.25,7.38 U4.16
  Bottom 0.152: v74.88,24 77.75,21.12 v85.75,21.12
LED2_20  (via drill 0.35)
  Top 0.152: X3.20 77.88,25.25 77.88,19.38 v77.75,19.25 | v79.88,12 79.75,11.88 U4.17
  Route2 0.152: v77.75,19.25 77.75,18.38 80.38,15.75 80.38,12.5 v79.88,12
LED2_21
  Top 0.152: X4.1 85.12,25.25 85.12,8.25 83.5,6.62 80.75,6.62 U4.19
LED2_22  (via drill 0.35)
  Top 0.152: X4.2 95.75,24.62 94.5,23.38 91.88,23.38 v91.88,21.12 | v81.5,10.75 81.25,10.5 U4.20
  Route2 0.152: v81.5,10.75 v91.88,21.12
LED2_23  (via drill 0.35)
  Top 0.152: X4.3 96.25,24.25 94.5,22.5 94.5,20.75 93.38,19.62 86.88,19.62 v86.88,11.38 | v84.38,8.88 84,8.5 84,7.62 83.38,7 82.25,7 U4.22
  Route2 0.152: v84.38,8.88 v86.88,11.38
LED2_24  (via drill 0.35)
  Top 0.152: X4.4 96.75,24 96,23.25 v96,23.12 | v84.5,20.5 84.38,20.38 84.38,12.25 82.75,10.62 U4.23
  Bottom 0.152: v96,23.12 93.38,20.5 v84.5,20.5
LED2_25  (via drill 0.35)
  Top 0.152: X4.5 97.25,24 96.62,23.38 96.62,22.88 v95.12,21.38 | v93.25,13.12 94.62,11.75 94.62,9 94.75,8.88 U5.2
  Route2 0.152: v95.12,21.38 92.75,19 92.75,13.62 v93.25,13.12
LED2_26  (via drill 0.35)
  Top 0.152: X4.6 97.75,24 97,23.25 97,22.38 v95,20.38 | v94,13.75 95,12.75 95,9.12 95.25,8.88 U5.3
  Route2 0.152: v95,20.38 95,19.25 94,18.25 v94,13.75
LED2_27  (via drill 0.35)
  Top 0.152: X4.7 98.25,23.62 v97.62,23 | v96,6.75 96.25,7 U5.5
  Route2 0.152: v97.62,23 97.62,21.38 94.62,18.38 94.62,8.12 v96,6.75
LED2_28
  Top 0.152: X4.8 98.75,23.25 94.75,19.25 90.75,19.25 90.75,7.75 91.75,6.75 92.62,6.75 92.62,13.38 93.62,14.38 95.38,14.38 95.38,10.25 96.75,8.88 U5.6
LED2_29  (via drill 0.35)
  Top 0.152: X4.9 99.25,21.88 v96.38,19 | U5.8 v97.75,6.75
  Route2 0.152: v96.38,19 96.38,14.12 96.12,13.88 96.12,8.38 v97.75,6.75
LED2_30  (via drill 0.35)
  Top 0.152: v99.75,20.38 X4.10 | v98.88,6.75 98.25,7.38 U5.9
  Route2 0.152: v99.75,20.38 99.75,17.88 99.25,17.38 99.25,11.5 98.88,11.12 v98.88,6.75
LED2_31  (via drill 0.35)
  Top 0.152: X4.11 100.25,22.25 v100.38,22.12 | v99.88,6.75 99.25,7.38 U5.11
  Route2 0.152: v100.38,22.12 100.88,22.12 102.5,20.5 102.5,20.12 103.12,19.5 103.12,18.62 101.88,17.38 101.88,8.75 v99.88,6.75
LED2_32  (via drill 0.35)
  Top 0.152: X4.12 100.75,22.62 101,22.38 101,20.75 98.25,18 v97.38,18 | v97.38,12.5 98.62,11.25 98.62,10 99.75,8.88 U5.12
  Route2 0.152: v97.38,12.5 v97.38,18
LED2_33  (via drill 0.35)
  Top 0.152: X4.13 101.25,24.12 v101.38,24 | v98.62,12.5 98.88,12.25 98.88,11.5 99,11.38 99,10.12 100.25,8.88 U5.13
  Route2 0.152: v101.38,24 98.12,20.75 98.12,17.75 97.88,17.5 97.88,14.25 98.62,13.5 v98.62,12.5
LED2_34  (via drill 0.35)
  Top 0.152: X4.14 101.75,24.5 102,24.25 102,23 v101.75,22.75 | v101.38,6.75 100.75,7.38 U5.14
  Route2 0.152: v101.75,22.75 104.5,20 104.5,18.88 105.62,17.75 105.62,11.38 101.38,7.12 v101.38,6.75
LED2_35  (via drill 0.35)
  Top 0.152: X4.15 102.25,24.5 102.38,24.38 102.38,21.25 v101.62,20.5 | v100.88,12.5 101.62,11.75 101.62,9 101.75,8.88 U5.16
  Route2 0.152: v101.62,20.5 100.62,19.5 100.62,12.75 v100.88,12.5
LED2_36  (via drill 0.35)
  Top 0.152: X4.16 102.75,21 102.5,20.75 v102.5,19.25 | v103.25,10.38 102.25,9.38 U5.17
  Route15 0.152: v102.5,19.25 102.5,12.62 103.25,11.88 v103.25,10.38
LED2_37  (via drill 0.35)
  Top 0.152: X4.17 103.25,23.5 103.12,23.38 v103.12,20.5 | v104.25,2.12 103.62,2.75 103.62,7 103.25,7.38 U5.19
  Bottom 0.152: v103.12,20.5 106,20.5 106.38,20.12 106.38,2.12 v104.25,2.12
LED2_38  (via drill 0.35)
  Top 0.152: X4.18 103.75,23.5 103.62,23.38 103.62,20.88 104,20.5 v104,18.5 | v105,13 104.62,12.62 104.62,9.75 103.75,8.88 U5.20
  Route2 0.152: v104,18.5 104,14 v105,13
LED2_39  (via drill 0.35)
  Top 0.152: v104.25,23.12 X4.19 | v107.12,20.25 106.75,19.88 106.75,7.38 106,6.62 105.25,6.62 105.25,6.88 104.75,7.38 U5.22
  Bottom 0.152: v107.12,20.25 v104.25,23.12
LED2_40
  Top 0.152: X4.20 105.5,24.5 105.5,20.75 105.75,20.5 106.38,20.5 106.38,7.5 105.88,7 105.62,7 105.25,7.38 U5.23
N$1
  Bottom 0.152: SR1.9 14.5,9.25 15.38,10.12 29.62,10.12 30.5,9.25 SR2.14
N$2
  Bottom 0.152: SR4.9 82,9.25 82.75,10 95.12,10 95.25,10.12 97.12,10.12 98,9.25 SR5.14
N$4
  Bottom 0.152: SR3.9 59.5,9.12 60.75,7.88 74.25,7.88 75.5,9.12 SR4.14
N$8
  Bottom 0.152: SR2.9 37,9.12 37.88,8.25 52.12,8.25 53,9.12 SR3.14
SR_OUT1_1  (via drill 0.35)
  Top 0.152: v4,9.5 3.75,9.75 3.75,16.62 4.12,17 4.62,17 | 4.62,17 4.75,17 U1.47 | U1.36 10.25,18.75 v10.38,18.88 | 4.62,17 v4.62,18.88
  Bottom 0.152: SR1.15 5.88,8.25 5.25,8.25 v4,9.5 | v4.62,18.88 v10.38,18.88
SR_OUT1_2  (via drill 0.35)
  Top 0.152: v5.88,18.25 5.12,17.5 5.12,16.75 5.25,16.62 U1.46 | U1.35 10.75,16.62 v12,17.88
  Bottom 0.152: SR1.1 5.5,14.88 5.5,16.62 5.12,17 5.12,18.25 v5.88,18.25 11.62,18.25 v12,17.88
SR_OUT1_3  (via drill 0.35)
  Top 0.152: v5.75,17.25 6.25,16.75 U1.44 | U1.33 11.75,16.62 12.38,17.25 v12.75,17.25
  Bottom 0.152: 6.75,16.62 6.75,14.88 SR1.2 | 6.75,16.62 6.38,16.62 v5.75,17.25 | v12.75,17.25 12.38,16.88 7.25,16.88 7,16.62 6.75,16.62
SR_OUT1_4  (via drill 0.35)
  Top 0.152: U1.43 v6.75,17.25 | U1.32 12.25,14.25 v12.88,13.62
  Route2 0.152: v4.5,13.62 4.5,12.88 5,12.38 6.5,12.38 7.12,11.75 7.62,11.75 | 7.62,11.75 8,12.12 8,16 v6.75,17.25 | v12.88,13.62 12.88,7.25 13.38,6.75 13.38,6.25 13,5.88 11.5,5.88 7.62,9.75 7.62,11.75
  Bottom 0.152: v4.5,13.62 6.88,13.62 8,14.75 SR1.3
SR_OUT1_5  (via drill 0.35)
  Top 0.152: v8.75,20.75 6.88,20.75 6.88,18.62 7.75,17.75 U1.41 | U1.30 13.25,16.88 13.38,17 13.38,18 v12.62,18.75
  Route2 0.152: v12.62,18.75 10.62,20.75 v8.75,20.75
  Bottom 0.152: v8.75,20.75 8.62,20.62 3.88,20.62 3.88,13.38 4.88,12.38 6.12,12.38 6.75,11.75 7.62,11.75 8.25,12.38 9.25,12.38 9.25,14.75 SR1.4
SR_OUT1_6  (via drill 0.35)
  Top 0.152: 14.25,17.88 13.75,17.38 U1.29 | 14.25,17.88 v14.62,18.25 | U1.40 8.25,19 v8.75,19.5 | v12,20.25 14.25,18 14.25,17.88
  Bottom 0.152: v14.62,18.25 12.88,16.5 12.38,16.5 10.75,14.88 SR1.5 | v8.75,19.5 9.5,20.25 v12,20.25
SR_OUT1_7  (via drill 0.35)
  Top 0.152: v10.38,13.62 9.25,14.75 U1.38 | U1.27 14.75,14.12 v14.25,13.62
  Bottom 0.152: 11.38,14.25 10.75,13.62 v10.38,13.62 | 11.38,14.25 11.88,14.75 SR1.6 | v14.25,13.62 13.62,13 12.62,13 11.38,14.25
SR_OUT1_8  (via drill 0.35)
  Top 0.152: v15.62,17.25 15.25,16.88 U1.26 | v9.75,19.62 U1.37
  Bottom 0.152: SR1.7 v15.62,17.25 15.62,18.12 14.25,19.5 9.88,19.5 v9.75,19.62
SR_OUT2_1  (via drill 0.35)
  Top 0.152: v26,12 27.25,13.25 U2.47 | U2.36 32.75,14.88 31.88,14 v31.88,12.5
  Route2 0.152: v26,12 v26,8.5
  Bottom 0.152: SR2.15 28.38,8.25 26.25,8.25 v26,8.5 | v31.88,12.5 31.12,11.75 26.25,11.75 v26,12
SR_OUT2_2  (via drill 0.35)
  Top 0.152: U2.46 v27.75,17.25 | U2.35 33.25,19 32.88,19.38 30.12,19.38 v30.12,19.25
  Bottom 0.152: 27.88,17.25 28,17.25 28,14.88 SR2.1 | v30.12,19.25 28.75,17.88 28.5,17.88 27.88,17.25 | 27.88,17.25 v27.75,17.25
SR_OUT2_3  (via drill 0.35)
  Top 0.152: U2.44 v28.75,17.25 28.75,19.88 32.88,19.88 33.62,19.12 33.62,17.62 34.25,17 U2.33
  Bottom 0.152: v28.75,17.25 29.25,17.25 29.25,14.88 SR2.2
SR_OUT2_4  (via drill 0.35)
  Top 0.152: v30.62,18 29.38,18 29.38,16.75 29.25,16.62 U2.43 | U2.32 34.75,17 34.38,17.38 v34.38,19.12
  Bottom 0.152: SR2.3 30.62,14.88 v30.62,18 32,19.38 34.12,19.38 v34.38,19.12
SR_OUT2_5  (via drill 0.35)
  Top 0.152: v31.25,17.25 30.62,17.25 30.62,17 30.25,16.62 U2.41 | U2.30 35.75,16.75 35.12,17.38 v35.12,17.5
  Bottom 0.152: 31.75,17.25 31.75,14.88 SR2.4 | v31.25,17.25 31.75,17.25 | v35.12,17.5 34.88,17.25 31.75,17.25
SR_OUT2_6  (via drill 0.35)
  Top 0.152: v36.12,17.25 36.25,17.12 U2.29 | U2.40 30.75,13.12 v30.62,13
  Bottom 0.152: v36.12,17.25 35.75,16.88 33.25,16.88 33.25,14.88 SR2.5 33.12,14.75 33.12,13.5 32.75,13.12 30.75,13.12 v30.62,13
SR_OUT2_7  (via drill 0.35)
  Top 0.152: v37.12,17.25 37.25,17.12 U2.27 | U2.38 31.75,16.88 32,17.12 v32,17.88
  Bottom 0.152: SR2.6 34.5,14.88 34.5,16.5 36.38,16.5 v37.12,17.25 36.25,18.12 32.25,18.12 v32,17.88
SR_OUT2_8  (via drill 0.35)
  Top 0.152: v38.12,17.25 37.75,16.88 U2.26 | U2.37 32.25,16.88 32.62,17.25 v32.62,18.75
  Bottom 0.152: SR2.7 35.75,14.88 35.75,16.12 37,16.12 v38.12,17.25 36.88,18.5 32.88,18.5 v32.62,18.75
SR_OUT3_1  (via drill 0.35)
  Top 0.152: v50.12,10.75 49.75,11.12 U3.47 | U3.36 55.25,14.88 54.38,14 v54.38,12.38
  Route15 0.152: v54.38,12.38 52.75,10.75 v50.12,10.75
  Bottom 0.152: v50.12,10.75 50.25,10.75 51.75,9.25 SR3.15
SR_OUT3_2  (via drill 0.35)
  Top 0.152: U3.46 v50.25,17.25 | U3.35 55.75,14.5 v55,13.75
  Bottom 0.152: v50.25,17.25 50.5,17.25 50.5,14.88 SR3.1 50.62,14.75 51.5,13.88 54.88,13.88 v55,13.75
SR_OUT3_3  (via drill 0.35)
  Top 0.152: U3.44 v51.25,17.25 | U3.33 56.75,17 56.5,17.25 v56.5,19.38
  Bottom 0.152: 51.62,17.25 51.75,17.25 51.75,14.88 SR3.2 | v56.5,19.38 56,18.88 53.25,18.88 51.62,17.25 | 51.62,17.25 v51.25,17.25
SR_OUT3_4  (via drill 0.35)
  Top 0.152: v52.5,17.25 51.88,17.25 51.88,16.75 51.75,16.62 U3.43 | U3.32 57.25,17 57,17.25 57,18.5 v57.25,18.75
  Bottom 0.152: 53,17.25 53,14.88 SR3.3 | v52.5,17.25 53,17.25 | v57.25,18.75 57,18.5 54.25,18.5 53,17.25
SR_OUT3_5  (via drill 0.35)
  Top 0.152: v54,17.25 53.12,17.25 53.12,17 52.75,16.62 U3.41 | U3.30 58.25,16.75 57.62,17.38 v57.62,17.5
  Bottom 0.152: 54.25,17.25 54.25,14.88 SR3.4 | v57.62,17.5 57.38,17.25 54.25,17.25 | 54.25,17.25 v54,17.25
SR_OUT3_6  (via drill 0.35)
  Top 0.152: v58.62,17.25 58.75,17.12 U3.29 | U3.40 53.25,13.38 v53.12,13.25
  Bottom 0.152: v58.62,17.25 58.25,16.88 57.75,16.88 55.75,14.88 SR3.5 55.62,14.75 55.62,13.5 55.25,13.12 53.25,13.12 v53.12,13.25
SR_OUT3_7  (via drill 0.35)
  Top 0.152: v59.62,17.25 59.75,17.12 U3.27 | U3.38 54.25,16.62 55.12,17.5 v55.12,17.88
  Bottom 0.152: SR3.6 57,14.88 58.75,16.62 59,16.62 v59.62,17.25 58.75,18.12 55.38,18.12 v55.12,17.88
SR_OUT3_8  (via drill 0.35)
  Top 0.152: U3.26 60.25,16.88 v60.62,17.25 60.62,20 56.25,20 55.88,19.62 55.88,17.75 54.75,16.62 U3.37
  Bottom 0.152: v60.62,17.25 SR3.7
SR_OUT4_1  (via drill 0.35)
  Top 0.152: v71.5,10.62 72.25,11.38 U4.47 | U4.36 77.75,12.88 77.5,12.62 77.5,11.62 v77.62,11.5
  Bottom 0.152: SR4.15 73.38,8.25 72.5,8.25 71.5,9.25 v71.5,10.62 72.25,11.38 75,11.38 75.12,11.25 77.38,11.25 v77.62,11.5
SR_OUT4_2  (via drill 0.35)
  Top 0.152: U4.46 v72.75,17.25 | U4.35 78.25,12.5 v78.12,12.38
  Bottom 0.152: v72.75,17.25 73,17.25 73,14.88 SR4.1 73.12,14.75 73.12,13.38 73.62,12.88 77.62,12.88 v78.12,12.38
SR_OUT4_3  (via drill 0.35)
  Top 0.152: U4.44 v73.75,17.25 | U4.33 79.25,18.75 v79,19
  Bottom 0.152: 74.25,17.25 74.25,14.88 SR4.2 | v73.75,17.25 74.25,17.25 | v79,19 78.62,18.62 75.62,18.62 74.25,17.25
SR_OUT4_4  (via drill 0.35)
  Top 0.152: v75.5,17.25 74.38,17.25 74.38,16.75 74.25,16.62 U4.43 | U4.32 79.75,18.38 v79.88,18.5
  Bottom 0.152: SR4.3 75.5,14.88 v75.5,17.25 76.5,18.25 79.62,18.25 v79.88,18.5
SR_OUT4_5  (via drill 0.35)
  Top 0.152: v80.38,17.25 80.75,16.88 U4.30 | U4.41 75.25,14 v75.62,13.62
  Bottom 0.152: v80.38,17.25 79.25,17.25 76.88,14.88 SR4.4 76.88,14.75 76,13.88 75.88,13.88 v75.62,13.62
SR_OUT4_6  (via drill 0.35)
  Top 0.152: v76.62,13.62 75.75,14.5 U4.40 | v81.25,13.62 U4.29
  Bottom 0.152: 77.25,13.88 77,13.62 v76.62,13.62 | 77.25,13.88 78.12,14.75 SR4.5 | v81.25,13.62 81,13.88 77.25,13.88
SR_OUT4_7  (via drill 0.35)
  Top 0.152: v81.88,17.25 82.25,16.88 U4.27 | U4.38 76.75,17 v77.12,17.38
  Bottom 0.152: 81.62,17 79.5,14.88 SR4.6 | v77.12,17.38 77.62,17.88 80.75,17.88 81.62,17 | 81.62,17 v81.88,17.25
SR_OUT4_8  (via drill 0.35)
  Top 0.152: U4.26 82.75,16.88 v83.12,17.25 83.12,19.62 78.75,19.62 78.38,19.25 78.38,17.75 77.25,16.62 U4.37
  Bottom 0.152: v83.12,17.25 SR4.7
SR_OUT5_1  (via drill 0.35)
  Top 0.152: v92,7.38 92.25,7.62 92.25,11.75 | 92.25,11.75 92.25,13.5 93.5,14.75 94.75,14.75 U5.47 | v100.25,11.75 U5.36 | 92.25,11.75 v92,11.75
  Bottom 0.152: SR5.15 95,7.38 v92,7.38 | v92,11.75 v100.25,11.75
SR_OUT5_2  (via drill 0.35)
  Top 0.152: U5.46 v95.25,17.25 | U5.35 100.75,14.25 v101.25,13.75
  Route15 0.152: v101.25,13.75 98.75,13.75 v95.25,17.25
  Bottom 0.152: v95.25,17.25 95.5,17.25 95.5,14.88 SR5.1
SR_OUT5_3  (via drill 0.35)
  Top 0.152: v95.38,18.25 96.25,17.38 U5.44 | U5.33 101.75,17.75 101.25,18.25 v101.25,19.25
  Bottom 0.152: 96.75,18.25 96.75,14.88 SR5.2 | v95.38,18.25 96.75,18.25 | v101.25,19.25 100.62,18.62 97.12,18.62 96.75,18.25
SR_OUT5_4  (via drill 0.35)
  Top 0.152: U5.43 v96.75,13.62 | U5.32 102.25,18.12 v101.88,18.5
  Bottom 0.152: v96.75,13.62 96.88,13.62 98,14.75 SR5.3 98,14.88 97.88,14.88 97.88,17.5 98.62,18.25 101.62,18.25 v101.88,18.5
SR_OUT5_5  (via drill 0.35)
  Top 0.152: v98.5,17.25 97.75,17.25 U5.41 | v103.25,17.88 U5.30
  Bottom 0.152: v98.5,17.25 99.12,17.25 | 99.12,17.25 99.25,17.25 99.25,14.88 SR5.4 | v103.25,17.88 99.75,17.88 99.12,17.25
SR_OUT5_6  (via drill 0.35)
  Top 0.152: v98,13.25 98.25,13.5 U5.40 | U5.29 103.75,14 v103.38,13.62
  Bottom 0.152: 100,14.12 99.12,13.25 v98,13.25 | 100,14.12 100.62,14.75 SR5.5 | v103.38,13.62 102.88,13.12 101,13.12 100,14.12
SR_OUT5_7  (via drill 0.35)
  Top 0.152: v104.62,17.25 104.75,17.12 U5.27 | U5.38 99.25,11.62 99.62,11.25 v99.62,11
  Route15 0.152: v99.62,11 101.75,11 103,9.75 103.5,9.75 105.62,11.88 105.62,16.25 v104.62,17.25
  Bottom 0.152: v104.62,17.25 104.38,17.25 102,14.88 SR5.6
SR_OUT5_8  (via drill 0.35)
  Top 0.152: v105.12,19.12 105.25,19 U5.26 | U5.37 99.75,17 v100,17.25
  Bottom 0.152: SR5.7 105.25,16.88 105.25,17.88 | 105.25,17.88 105.25,19.12 v105.12,19.12 | v100,17.25 103.75,17.25 104.38,17.88 105.25,17.88
VCC  (via drill 0.35)
  Top 0.152: U5.7 97.25,7.12 97.12,7 97.12,6.5 97.5,6.12 98.5,6.12 | 98.5,6.12 102.75,6.12 U5.18 | 98.5,6.12 98.5,2.12 96.88,2.12 95,4 JP4.1 94.88,4 93.5,5.38 v93.5,8 | 80.25,10.38 80.25,11.5 80.5,11.75 80.5,14.88 80.25,15.12 U4.31 | 80.25,10.38 U4.18 | v102.62,11.62 102.75,11.75 U5.31 | U5.42 97.25,17.25 95.62,18.88 91.38,18.88 v91.38,9.38 | v80.38,10.38 80.25,10.38 | v7.25,6.75 U1.7 | v29.75,6.5 U2.7 | U2.42 29.75,17 v30,17.25 | U1.31 12.75,15.12 13.5,14.38 13.5,12.88 12.75,12.12 U1.18 v12.75,6.5 | U1.42 7.25,16.88 7.38,17 7.38,17.62 5.38,19.62 v5.25,19.62 | JP3.1 72.5,4 72.5,4.25 74.75,6.5 U4.7 v74.75,10.75 U4.42 | U3.42 52.25,11.38 | 52.25,11.38 U3.7 | U2.31 v35.25,10.38 U2.18 | v57.75,6.75 U3.18 | v57.75,12.12 U3.31 | v52.38,11.38 52.25,11.38
  Route15 0.152: v102.62,11.62 101.12,13.12 100.12,13.12 98.25,11.25 93.25,11.25 v91.38,9.38 | v30,17.25 30,13.38 29.25,12.62 29.25,9.75 | 29.25,9.75 29.25,7 v29.75,6.5 | 7.25,10.25 8.88,10.25 12.62,6.5 | 7.25,10.25 v4.62,10.25 3.88,11 3.88,16.25 5.25,17.62 v5.25,19.62 | 12.62,6.5 15.12,4 JP1.1 | 12.62,6.5 v12.75,6.5 | 7.25,10.25 v7.25,6.75 | 29.25,9.75 34.62,9.75 v35.25,10.38
  Bottom 0.152: SR5.10 102.62,9.75 v102.62,11.62 | 74.62,10.75 74.75,10.88 79,10.88 79.88,10 | 74.62,10.75 73.12,9.25 SR4.16 | 79.88,10 SR4.10 81.62,8.25 91.38,8.25 | 91.38,8.25 93.5,8.25 | 93.5,8.25 94.62,8.25 95.5,9.12 SR5.16 | 91.38,8.25 v91.38,9.38 | v80.38,10.38 80,10 79.88,10 | 93.5,8.25 v93.5,8 | SR2.16 28,9.12 25.75,9.12 24.88,8.25 14.12,8.25 SR1.10 12.25,10.12 10,10.12 10,8.5 9,7.5 8,7.5 v7.25,6.75 | v29.75,6.5 27.5,4.25 27.5,4 JP2.1 JP1.1 | v4.62,10.25 5.5,10.25 5.5,9.25 SR1.16 | 36.12,9.62 36.62,10.12 43.75,10.12 45,8.88 50.25,8.88 50.5,9.12 SR3.16 50.5,9.25 50.5,9.5 49.88,10.12 49.5,10.12 49.5,11 49.88,11.38 v52.38,11.38 57.75,11.38 | 36.12,9.62 35.75,9.25 SR2.10 | 57.75,11.38 58.25,11.38 58.25,9.25 SR3.10 58.12,9.12 57.75,9.12 v57.75,6.75 58,6.75 58.62,6.12 70.25,6.12 72.38,4 JP3.1 | 57.75,11.38 v57.75,12.12 | v35.25,10.38 36,9.62 36.12,9.62 | v74.75,10.75 74.62,10.75

## Text on the board
tNames: 2 | 1 | 3 | 4 | 5 | Latch | CLK | DataIn | GND | VDD | VDD | GND | DataIn | CLK | Latch | EN1 | EN2 | EN1 | EN2 | VDD | GND | DataOut | CLK | Latch | VDD | GND | DataOut | CLK | Latch
bNames: Hsia & Warren / 20230714 / SR+Latch For RIS | C:/Users/pw0000/Downloads/Latch&SR_Board/main.bmp | 2 | 1 | 3 | 4 | 5